# EAGLE board OpenBook_Board (EAGLE 9.7.0)
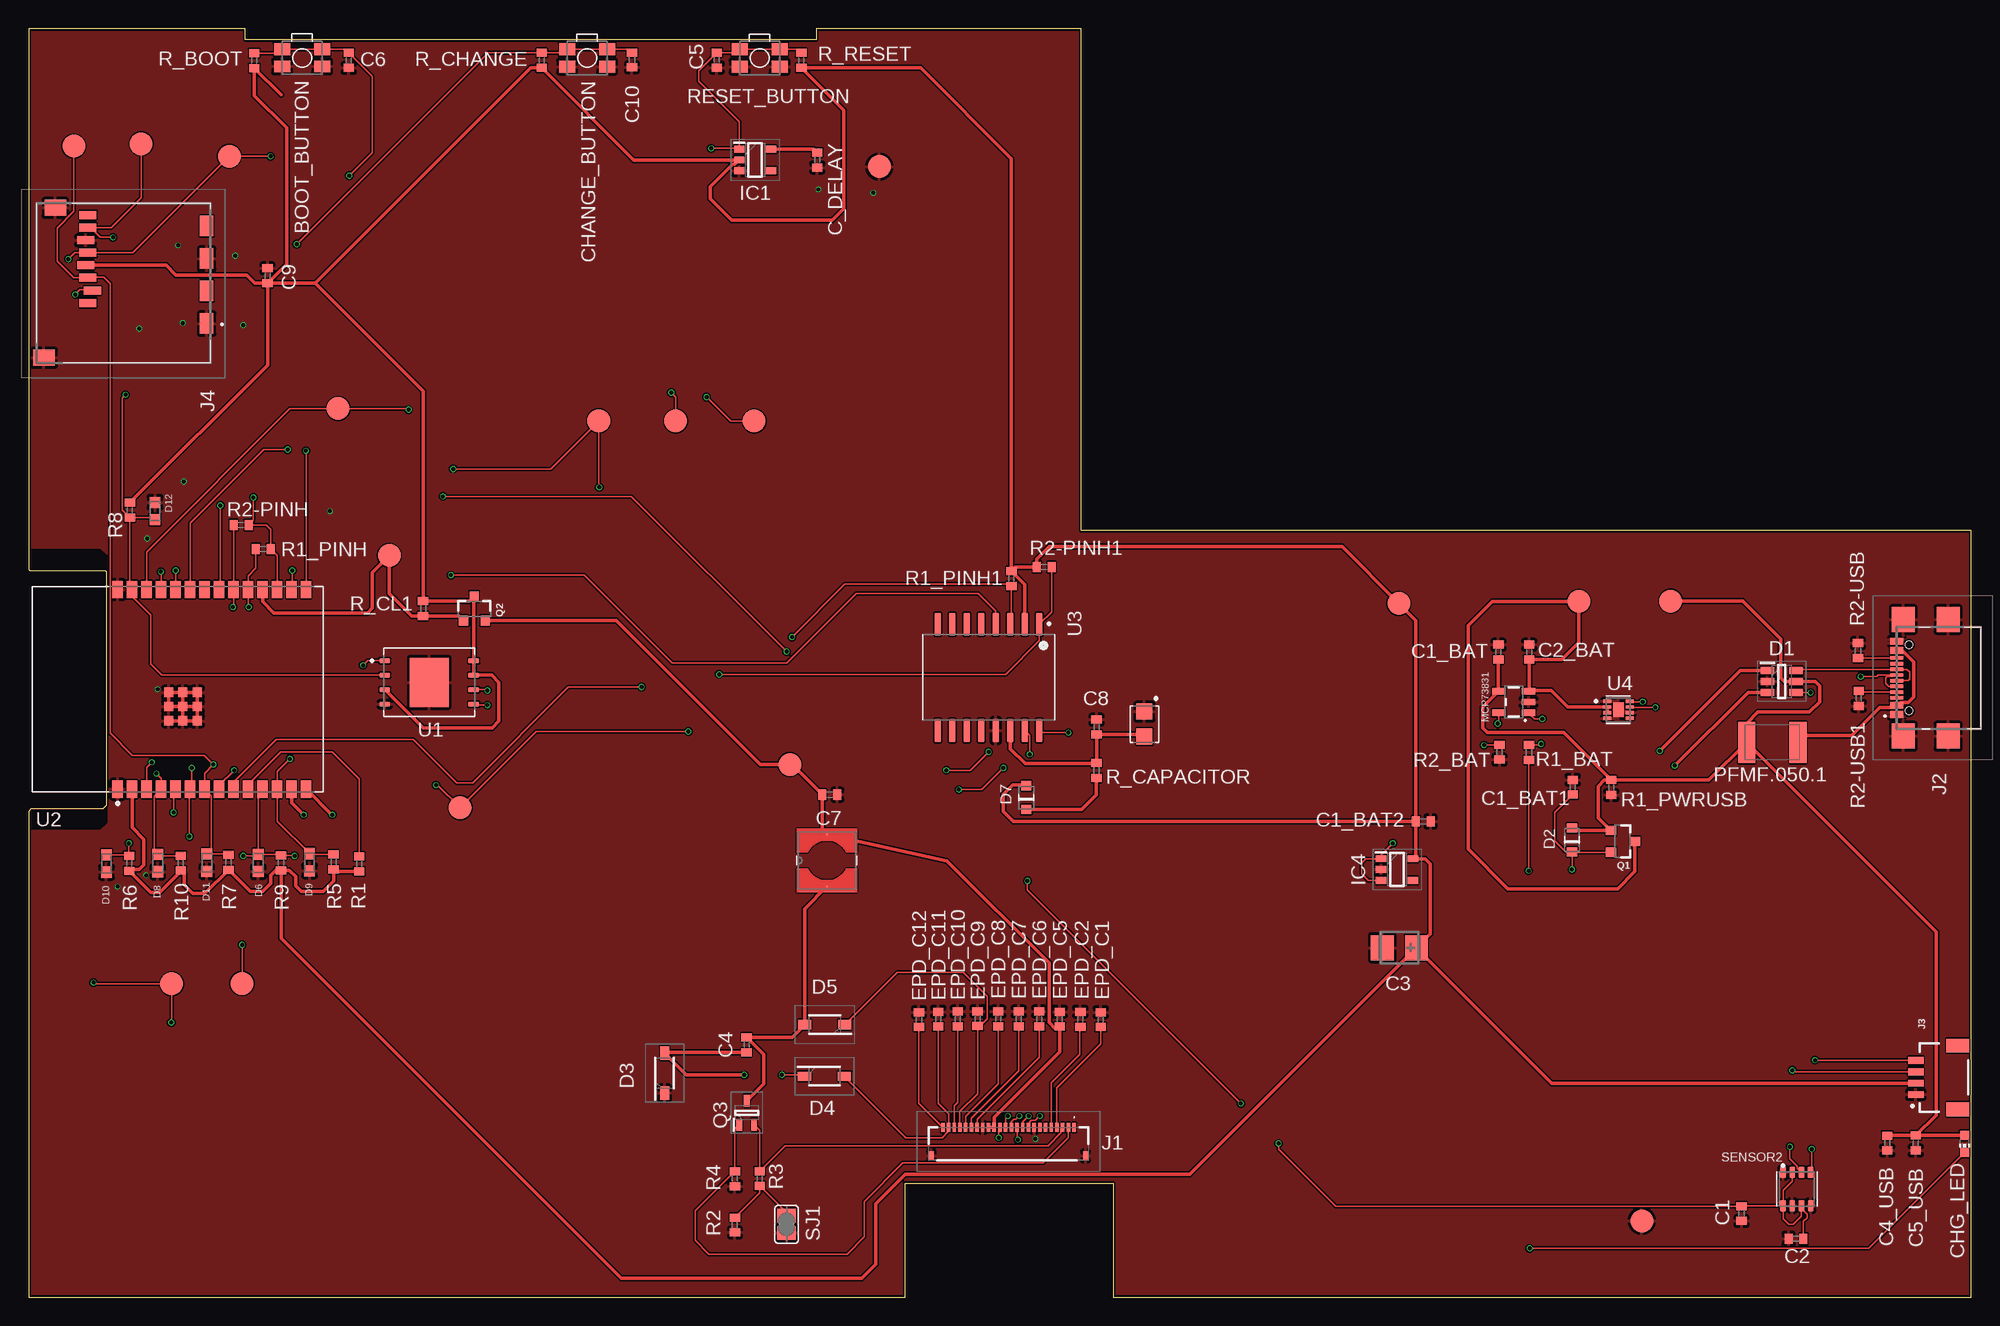
[diagram p0: board, top side]
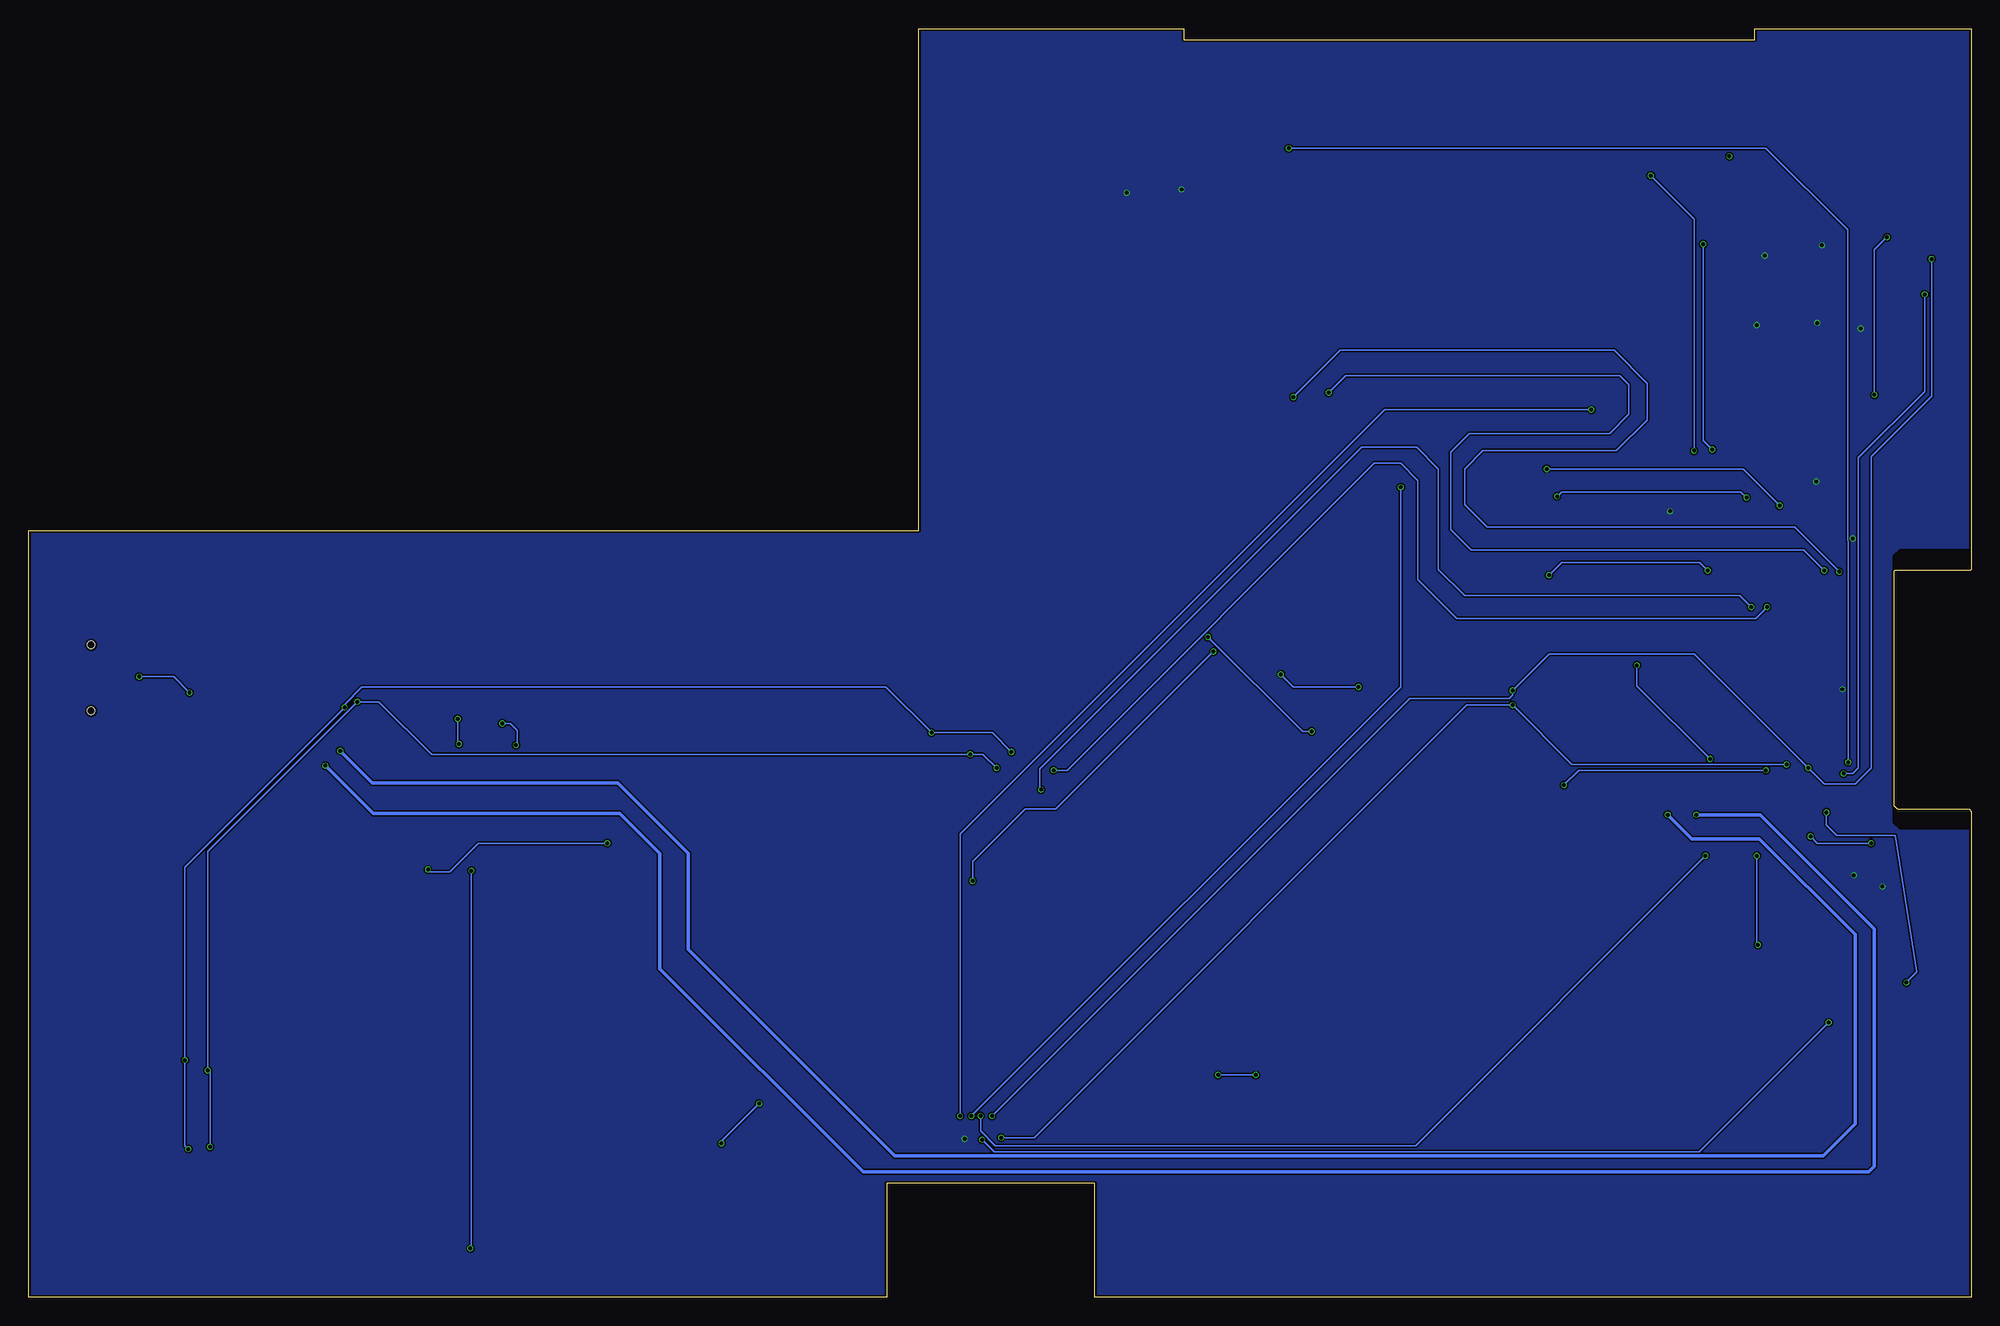
[diagram p1: board, bottom side, seen from below]

Size 170.2 x 111.2 mm. Coordinates in mm from the lower left corner, seen from the top.
Outline: 92.2,111.2 69,111.2 69,110.2 19,110.2 19,111.2 0,111.2 0,63.8 0.1,63.7 6.7,63.7 6.8,63.6 6.8,43.1 6.5,42.8 0.2,42.8 0,42.6 0,0 76.8,0 76.8,10 95,10 95,0 170.2,0 170.2,67.2 92.2,67.2 92.2,111.2
Copper layers (1*16): Top 0.035mm / dielectric 1.6mm / Bottom 0.035mm
Design rules "jlcpcb-2layers *": minimum track width 5mil, minimum drill 0.3mm, track to track 5mil, track to pad 5mil, pad to pad 5mil, via to via 5mil, smd to smd 5mil, copper to edge 0.2mm, drill to drill 6mil, minimum pad ring 10mil, minimum via ring 3mil, stop-mask expansion 4mil, vias tented up to drill 0mil, thermal gap 10mil

## Footprints (pad centres in the part's own frame; a part is rotated, then mirrored left to right if it is on the bottom)
MYBUTTON = smd 1.4 x 1.05: 1 1.75,0.75; 2 -1.75,0.75; 3 -1.75,-0.75; 4 1.75,-0.75
EAGLE-LTSPICE_C0402 = smd 0.7 x 0.9: 1 -0.65,0; 2 0.65,0
RCL_CT3528 = smd 2 x 2.2: + -1.5,0; - 1.5,0
CAPCP3225X100N = smd 1.4 x 1.4: 1 -1.1,0; 2 1.1,0
ADAFRUIT_CHIP-LED0603 = smd 0.8 x 0.8: A 0,-0.75; C 0,0.75
SOT95P280X145-6N = smd 1.2 x 0.6: 1 -1.25,0.95; 2 -1.25,0; 3 -1.25,-0.95; 4 1.25,-0.95; 5 1.25,0; 6 1.25,0.95
ESP32_WROVER_AVX---SD0805S020S1R0_AVX_SD0805S020S1R0_0 = smd 0.8 x 0.9: 1 -1.05,0; 2 1.05,0
SOD3716X135N = smd 1.15 x 0.8: 1 -1.75,0; 2 1.75,0
DIOC1608X36N = smd 0.97 x 0.94: 1 -0.75,0; 2 0.75,0
SOT95P280X125-5N = smd 0.9 x 0.6: 1 -1.4,0.95; 2 -1.4,0; 3 -1.4,-0.95; 4 1.4,-0.95; 5 1.4,0.95
SOT95P280X120-5N = smd 0.9 x 0.6: 1 -1.4,0.95; 2 -1.4,0; 3 -1.4,-0.95; 4 1.4,-0.95; 5 1.4,0.95
FH34SRJ24S05SH99 = smd 0.3 x 0.8: 1 5.75,1.45; 2 5.25,1.45; 3 4.75,1.45; 4 4.25,1.45; 5 3.75,1.45; 6 3.25,1.45; 7 2.75,1.45; 8 2.25,1.45; 9 1.75,1.45; 10 1.25,1.45; 11 0.75,1.45; 12 0.25,1.45; 13 -0.25,1.45; 14 -0.75,1.45; 15 -1.25,1.45; 16 -1.75,1.45; 17 -2.25,1.45; 18 -2.75,1.45; 19 -3.25,1.45; 20 -3.75,1.45; 21 -4.25,1.45; 22 -4.75,1.45; 23 -5.25,1.45; 24 -5.75,1.45 | smd 0.4 x 0.8: MP1 6.75,-1.05; MP2 -6.75,-1.05
SAMACSYS_PARTS_USB4110GFA = smd 0.3 x 1.15: A1 -3.35,3.678; A4 -2.55,3.678; A5 -1.25,3.678; A6 -0.25,3.678; A7 0.25,3.678; A8 1.25,3.678; A9 2.55,3.678; A12 3.35,3.678; B1 3.05,3.678; B4 2.25,3.678; B5 1.75,3.678; B6 0.75,3.678; B7 -0.75,3.678; B8 -1.75,3.678; B9 -2.25,3.678; B12 -3.05,3.678 | smd 2.18 x 2: MP1 -5.11,-0.827; MP2 5.11,-0.827; MP3 -5.11,3.103; MP4 5.11,3.103 | hole 0.65: -2.89,2.603; 2.89,2.603
JST04_1MM_RA = smd 0.6 x 1.35: 1 -1.5,0; 2 -0.5,0; 3 0.5,0; 4 1.5,0 | smd 1.2 x 2: NC1 2.8,-3.675; NC2 -2.8,-3.675
112ATAARR03ATTEND = smd 1.8 x 1.2: G1 10.6,10.4; G2 4.9,10.4; S1 7.75,10.4; S2 2.05,10.4 | smd 1.4 x 1.9: G3 13.6,-3.85; G4 0.45,-2.85 | smd 0.7 x 1.5: P1 8.8,0; P2 7.7,0.4; P3 6.6,0; P4 5.5,-0.2; P5 4.4,0; P6 3.3,-0.2; P7 2.2,0; P8 1.1,0
IND_4828-WE-TPC_WRE = smd 0.127 x 0.127: 1 -2.286,0; 2 2.286,0
ESP32_WROVER_SPARKFUN-IC-POWER_SOT23-5 = smd 0.55 x 1.2: 1 -0.95,-1.3; 2 0,-1.3; 3 0.95,-1.3; 4 0.95,1.3; 5 -0.95,1.3
ESP32C6_VARISTOR_CT/CN1812 = smd 1.5 x 3.6: 1 -2.25,0; 2 2.25,0
ESP32_WROVER_SPARKFUN-DISCRETESEMI_SOT23-3 = smd 0.8 x 0.9: 1 -0.95,-1; 2 0.95,-1; 3 0,1.1
SOT65P210X110-3N = smd 1.05 x 0.5: 1 -1.05,0.65; 2 -1.05,-0.65; 3 1.05,0
ESP32_WROVER_EAGLE-LTSPICE_R0402 = smd 0.7 x 0.9: 1 -0.65,0; 2 0.65,0
ESP32_WROVER_BME680_PSON80P300X300X100-8N = smd 1.016 x 0.5: 1 1.458,1.2; 2 1.458,0.4; 3 1.458,-0.4; 4 1.458,-1.2; 5 -1.458,-1.22; 6 -1.458,-0.4; 7 -1.458,0.4; 8 -1.458,1.2
SJ = smd 1.168 x 1.6: 1 -0.762,0; 2 0.762,0
TP20R = smd 2 x 2: TP 0,0
SON127P600X800X80-9N = smd 0.94 x 0.44: 1 -3.895,1.905; 2 -3.895,0.635; 3 -3.895,-0.635; 4 -3.895,-1.905; 5 3.895,-1.905; 6 3.895,-0.635; 7 3.895,0.635; 8 3.895,1.905 | smd 3.4 x 4.3: 9 0,0
XCVR_ESP32-C6-WROOM-1-N8 = smd 1.5 x 0.9: 1 -8.75,5.26; 2 -8.75,3.99; 3 -8.75,2.72; 4 -8.75,1.45; 5 -8.75,0.18; 6 -8.75,-1.09; 7 -8.75,-2.36; 8 -8.75,-3.63; 9 -8.75,-4.9; 10 -8.75,-6.17; 11 -8.75,-7.44; 12 -8.75,-8.71; 13 -8.75,-9.98; 14 -8.75,-11.25; 15 8.75,-11.25; 16 8.75,-9.98; 17 8.75,-8.71; 18 8.75,-7.44; 19 8.75,-6.17; 20 8.75,-4.9; 21 8.75,-3.63; 22 8.75,-2.36; 23 8.75,-1.09; 24 8.75,0.18; 25 8.75,1.45; 26 8.75,2.72; 27 8.75,3.99; 28 8.75,5.26 | smd 0.8 x 0.8: 29_1 -2.755,0.79; 29_2 -1.505,0.79; 29_3 -0.255,0.79; 29_4 -2.755,-0.46; 29_5 -1.505,-0.46; 29_6 -0.255,-0.46; 29_7 -2.755,-1.71; 29_8 -1.505,-1.71; 29_9 -0.255,-1.71
SOIC127P1032X265-16N = smd 2.05 x 0.59: 1 -4.655,4.445; 2 -4.655,3.175; 3 -4.655,1.905; 4 -4.655,0.635; 5 -4.655,-0.635; 6 -4.655,-1.905; 7 -4.655,-3.175; 8 -4.655,-4.445; 9 4.655,-4.445; 10 4.655,-3.175; 11 4.655,-1.905; 12 4.655,-0.635; 13 4.655,0.635; 14 4.655,1.905; 15 4.655,3.175; 16 4.655,4.445
SON50P200X200X80-9N = smd 0.76 x 0.27: 1 -0.985,0.75; 2 -0.985,0.25; 3 -0.985,-0.25; 4 -0.985,-0.75; 5 0.985,-0.75; 6 0.985,-0.25; 7 0.985,0.25; 8 0.985,0.75 | smd 0.9 x 1.3: 9 0,0

## Placement (x,y rotation side)
BOOT_BUTTON  BUTTON_CUSYOMV1  [MYBUTTON]  23.97,108.62 180 top
C1  100nF  [EAGLE-LTSPICE_C0402]  150.06,7.35 90 top
C1_BAT  4.7uF  [EAGLE-LTSPICE_C0402]  128.76,56.56 270 top
C1_BAT1  4.7uF  [EAGLE-LTSPICE_C0402]  135.28,44.72 270 top
C1_BAT2  4.7uF  [EAGLE-LTSPICE_C0402]  122.18,41.72 180 top
C2  100nF  [EAGLE-LTSPICE_C0402]  154.83,5.14 0 top
C2_BAT  4.7uF  [EAGLE-LTSPICE_C0402]  131.46,56.55 270 top
C3  100uF TANT  [RCL_CT3528]  120.08,30.65 180 top
C4  4.7uF/25V  [EAGLE-LTSPICE_C0402]  62.9,22.15 270 top
C4_USB  100nF  [EAGLE-LTSPICE_C0402]  162.82,13.53 90 top
C5  1uF  [EAGLE-LTSPICE_C0402]  60.28,108.43 90 top
C5_USB  4.7uF  [EAGLE-LTSPICE_C0402]  165.32,13.54 90 top
C6  100nF  [EAGLE-LTSPICE_C0402]  28.06,108.41 90 top
C7  10uF  [EAGLE-LTSPICE_C0402]  70.2,44.06 180 top
C8  100nF  [EAGLE-LTSPICE_C0402]  93.56,49.99 90 top
C9  100nF  [EAGLE-LTSPICE_C0402]  20.94,89.53 270 top
C10  100nF  [EAGLE-LTSPICE_C0402]  52.86,108.45 90 top
C10_SUPERCAP  CPH3225A  [CAPCP3225X100N]  97.75,50.24 270 top
C_DELAY  100nF  [EAGLE-LTSPICE_C0402]  69.1,99.67 90 top
CHANGE_BUTTON  BUTTON_CUSYOMV1  [MYBUTTON]  48.93,108.62 180 top
CHG_LED  [ADAFRUIT_CHIP-LED0603]  169.6,13.46 180 top
D1  USBLC6-2SC6Y  [SOT95P280X145-6N]  153.58,53.98 0 top
D2  ESP32_WROVER_AVX---SD0805S020S1R0_AVX_SD0805S020S1R0_0_0AVX_SD0805S020S1R0_0_0  [ESP32_WROVER_AVX---SD0805S020S1R0_AVX_SD0805S020S1R0_0]  135.21,40.09 90 top
D3  MBR0530  [SOD3716X135N]  55.72,19.66 90 top
D4  MBR0530  [SOD3716X135N]  69.72,19.39 0 top
D5  MBR0530  [SOD3716X135N]  69.74,23.91 180 top
D6  PGB1010603MR  [DIOC1608X36N]  20.12,38.08 90 top
D7  ESP32_WROVER_AVX---SD0805S020S1R0_AVX_SD0805S020S1R0_0_0AVX_SD0805S020S1R0_0_0  [ESP32_WROVER_AVX---SD0805S020S1R0_AVX_SD0805S020S1R0_0]  87.4,43.8 90 top
D8  PGB1010603MR  [DIOC1608X36N]  11.32,38.06 90 top
D9  PGB1010603MR  [DIOC1608X36N]  24.62,38.14 90 top
D10  PGB1010603MR  [DIOC1608X36N]  6.82,38.02 90 top
D11  PGB1010603MR  [DIOC1608X36N]  15.62,38.1 90 top
D12  PGB1010603MR  [DIOC1608X36N]  11.08,68.92 270 top
EPD_C1  1uF/50V  [EAGLE-LTSPICE_C0402]  93.92,24.35 90 top
EPD_C2  1uF/50V  [EAGLE-LTSPICE_C0402]  92.14,24.38 90 top
EPD_C5  1uF/50V  [EAGLE-LTSPICE_C0402]  90.34,24.39 90 top
EPD_C6  1uF/50V  [EAGLE-LTSPICE_C0402]  88.54,24.4 90 top
EPD_C7  1uF/50V  [EAGLE-LTSPICE_C0402]  86.74,24.41 90 top
EPD_C8  1uF/50V  [EAGLE-LTSPICE_C0402]  84.94,24.42 90 top
EPD_C9  1uF/50V  [EAGLE-LTSPICE_C0402]  83.14,24.43 90 top
EPD_C10  1uF/50V  [EAGLE-LTSPICE_C0402]  81.4,24.41 90 top
EPD_C11  1uF/50V  [EAGLE-LTSPICE_C0402]  79.7,24.39 90 top
EPD_C12  1uF/50V  [EAGLE-LTSPICE_C0402]  78,24.35 90 top
IC1  BD5229G-TR  [SOT95P280X125-5N]  63.65,99.68 0 top
IC4  XC6220A331MR-G  [SOT95P280X120-5N]  119.88,37.5 0 top
J1  FH34SRJ-24S-0.5SH_99_  [FH34SRJ24S05SH99]  85.84,13.45 0 top
J2  SAMACSYS_PARTS_USB4110-GF-A  [SAMACSYS_PARTS_USB4110GFA]  167.33,54.3 90 top
J3  QWIIC_RIGHT_ANGLE  [JST04_1MM_RA]  165.32,19.28 90 top
J4  112A-TAAR-R03_ATTEND  [112ATAARR03ATTEND]  5.2,95.95 270 top
L1  744043680IND_4828-WE-TPC_WRE  [IND_4828-WE-TPC_WRE]  69.94,38.3 90 top
MCP73831  ESP32_WROVER_SPARKFUN-IC-POWER_MCP73831  [ESP32_WROVER_SPARKFUN-IC-POWER_SOT23-5]  130.1,52.18 90 top
PFMF.050.1  ESP32C6_VARISTORCN1812  [ESP32C6_VARISTOR_CT/CN1812]  152.75,48.65 180 top
Q1  20V/4.2A/52mΩ/1.4W  [ESP32_WROVER_SPARKFUN-DISCRETESEMI_SOT23-3]  139.62,39.97 270 top
Q2  20V/4.2A/52mΩ/1.4W  [ESP32_WROVER_SPARKFUN-DISCRETESEMI_SOT23-3]  39.05,60.32 0 top
Q3  SI1308EDL-T1-GE3  [SOT65P210X110-3N]  62.91,16.19 90 top
R1  10K  [ESP32_WROVER_EAGLE-LTSPICE_R0402]  28.98,37.99 90 top
R1_BAT  200  [ESP32_WROVER_EAGLE-LTSPICE_R0402]  131.44,47.76 90 top
R1_PINH  10K  [ESP32_WROVER_EAGLE-LTSPICE_R0402]  20.56,65.58 0 top
R1_PINH1  10K  [ESP32_WROVER_EAGLE-LTSPICE_R0402]  86.1,63.01 90 top
R1_PWRUSB  100K  [ESP32_WROVER_EAGLE-LTSPICE_R0402]  138.65,44.68 270 top
R2  2.2  [ESP32_WROVER_EAGLE-LTSPICE_R0402]  61.88,6.35 90 top
R2-PINH  10K  [ESP32_WROVER_EAGLE-LTSPICE_R0402]  18.62,67.68 0 top
R2-PINH1  10K  [ESP32_WROVER_EAGLE-LTSPICE_R0402]  88.97,64 180 top
R2-USB  5k1  [ESP32_WROVER_EAGLE-LTSPICE_R0402]  160.26,56.69 90 top
R2-USB1  5k1  [ESP32_WROVER_EAGLE-LTSPICE_R0402]  160.32,52.5 90 top
R2_BAT  2k  [ESP32_WROVER_EAGLE-LTSPICE_R0402]  128.86,47.78 90 top
R3  0.47  [ESP32_WROVER_EAGLE-LTSPICE_R0402]  64.06,10.42 90 top
R4  10K  [ESP32_WROVER_EAGLE-LTSPICE_R0402]  61.88,10.41 90 top
R5  10K  [ESP32_WROVER_EAGLE-LTSPICE_R0402]  26.72,38.17 270 top
R6  10K  [ESP32_WROVER_EAGLE-LTSPICE_R0402]  8.82,38.05 270 top
R7  10K  [ESP32_WROVER_EAGLE-LTSPICE_R0402]  17.52,38.13 270 top
R8  10K  [ESP32_WROVER_EAGLE-LTSPICE_R0402]  8.88,68.99 90 top
R9  10K  [ESP32_WROVER_EAGLE-LTSPICE_R0402]  22.12,38.09 270 top
R10  10K  [ESP32_WROVER_EAGLE-LTSPICE_R0402]  13.34,38.06 270 top
R_BOOT  10K  [ESP32_WROVER_EAGLE-LTSPICE_R0402]  19.78,108.39 270 top
R_CAPACITOR  15  [ESP32_WROVER_EAGLE-LTSPICE_R0402]  93.55,46.18 270 top
R_CHANGE  10K  [ESP32_WROVER_EAGLE-LTSPICE_R0402]  44.95,108.41 270 top
R_CL1  10K  [ESP32_WROVER_EAGLE-LTSPICE_R0402]  34.56,60.37 90 top
R_RESET  10K  [ESP32_WROVER_EAGLE-LTSPICE_R0402]  67.7,108.41 270 top
RESET_BUTTON  BUTTON_CUSYOMV1  [MYBUTTON]  64.04,108.62 180 top
SENSOR2  ESP32_WROVER_BME680_BME680  [ESP32_WROVER_BME680_PSON80P300X300X100-8N]  154.9,9.5 90 top
SJ1  [SJ]  66.4,6.41 90 top
TP1  TPTP20R  [TP20R]  63.56,76.8 0 top
TP2  TPTP20R  [TP20R]  56.68,76.8 0 top
TP3  TPTP20R  [TP20R]  135.8,61 0 top
TP4  TPTP20R  [TP20R]  141.32,6.7 0 top
TP5  TPTP20R  [TP20R]  74.54,99.1 0 top
TP6  TPTP20R  [TP20R]  9.86,101.1 0 top
TP7  TPTP20R  [TP20R]  3.98,100.9 0 top
TP8  TPTP20R  [TP20R]  17.6,100 0 top
TP9  TPTP20R  [TP20R]  27.12,77.9 0 top
TP10  TPTP20R  [TP20R]  18.7,27.52 0 top
TP11  TPTP20R  [TP20R]  12.54,27.5 0 top
TP12  TPTP20R  [TP20R]  49.95,76.82 0 top
TP13  TPTP20R  [TP20R]  31.6,65.02 0 top
TP14  TPTP20R  [TP20R]  143.85,61.02 0 top
TP15  TPTP20R  [TP20R]  37.8,42.92 0 top
TP16  TPTP20R  [TP20R]  120.05,60.82 0 top
TP17  TPTP20R  [TP20R]  66.69,46.7 0 top
U1  W25Q512JVEIQ  [SON127P600X800X80-9N]  35.1,53.9 0 top
U2  ESP32-C6-WROOM-1-N8  [XCVR_ESP32-C6-WROOM-1-N8]  13.06,53.29 90 top
U3  DS3231SN#  [SOIC127P1032X265-16N]  84.11,54.34 270 top
U4  MAX17048G+T10  [SON50P200X200X80-9N]  139.27,51.5 0 top

## Library data of the parts
BOOT_BUTTON CHANGE_BUTTON CHG_LED PFMF.050.1 RESET_BUTTON SJ1 TP1-TP17 = DeskAssistant v19 v1
C1 C1_BAT C1_BAT1 C1_BAT2 C2 C2_BAT C4 C4_USB C5 C5_USB C6-C10 C_DELAY EPD_C1 EPD_C2 EPD_C5-EPD_C12 = DeskAssistant v19 v1; SPICEMODEL: NONE; SPICEPREFIX: C
C3 = DeskAssistant v19 v1; SPICEPREFIX: C
C10_SUPERCAP = DeskAssistant v19 v1; AVAILABILITY: Not in stock; CHECK_PRICES: https://www.snapeda.com/parts/CPH3225A/Seiko+Instruments/view-part/?ref=eda; DESCRIPTION: 11 mF (EDLC) Supercapacitor 3.3 V 1210 (3225 Metric) - -; MF: Seiko Instruments; MP: CPH3225A; PACKAGE: 1210 Seiko; PRICE: None; PURCHASE-URL: https://www.snapeda.com/api/url_track_click_mouser/?unipart_id=562593&manufacturer=Seiko Instruments&part_name=CPH3225A&search_term=None; SNAPEDA_LINK: https://www.snapeda.com/parts/CPH3225A/Seiko+Instruments/view-part/?ref=snap
D1 = DeskAssistant v19 v1; AVAILABILITY: In Stock; CHECK_PRICES: https://www.snapeda.com/parts/USBLC6-2SC6Y/STMicroelectronics/view-part/?ref=eda; DESCRIPTION: 17V Clamp 5A (8/20µs) Ipp Tvs Diode Surface Mount SOT-23-6; MF: STMicroelectronics; MP: USBLC6-2SC6Y; PACKAGE: SOT-23-6 STMicroelectronics; PRICE: None; SNAPEDA_LINK: https://www.snapeda.com/parts/USBLC6-2SC6Y/STMicroelectronics/view-part/?ref=snap
D2 = DeskAssistant v19 v1; CENTROID_NOT_SPECIFIED: No; DATASHEET: http://datasheets.avx.com/schottky.pdf; DIGIKEY_DESCRIPTION: DIODE SCHOTTKY 20V 1A 0805; DIGIKEY_PART_NUMBER: 478-7800-1-ND; LEAD_FREE: yes; MF: AVX; MOUSER_PART_NUMBER: 581-SD0805S020S1R0; PACKAGE: 0805 (2012 metric); PREFIX: D; ROHS: yes; SD0805S020S1R0: SD0805S020S1R0; TEMPERATURE_RANGE_HIGH: +125°C; TEMPERATURE_RANGE_LOW: -55°C
D3-D5 = DeskAssistant v19 v1; AVAILABILITY: In Stock; CHECK_PRICES: https://www.snapeda.com/parts/MBR0530/Onsemi/view-part/?ref=eda; DESCRIPTION: Diode Schottky 30 V 500mA Surface Mount SOD-123; MF: ON Semiconductor; MP: MBR0530; PACKAGE: SOD-123-2 ON Semiconductor; PRICE: None; PURCHASE-URL: https://www.snapeda.com/api/url_track_click_mouser/?unipart_id=179458&manufacturer=ON Semiconductor&part_name=MBR0530&search_term=None; SNAPEDA_LINK: https://www.snapeda.com/parts/MBR0530/Onsemi/view-part/?ref=snap
D6 D8-D12 = DeskAssistant v19 v1; AVAILABILITY: In Stock; CHECK_PRICES: https://www.snapeda.com/parts/PGB1010603MR/Littelfuse/view-part/?ref=eda; DESCRIPTION: 150V (Typ) Clamp - Ipp Tvs Diode Surface Mount 0603 (1608 Metric); MF: Littelfuse Inc.; MP: PGB1010603MR; PACKAGE: 0603 Littelfuse Inc.; PRICE: None; PURCHASE-URL: https://www.snapeda.com/api/url_track_click_mouser/?unipart_id=5659453&manufacturer=Littelfuse Inc.&part_name=PGB1010603MR&search_term=None; SNAPEDA_LINK: https://www.snapeda.com/parts/PGB1010603MR/Littelfuse/view-part/?ref=snap
D7 = DeskAssistant v19 v1; CENTROID_NOT_SPECIFIED: No; DATASHEET: http://datasheets.avx.com/schottky.pdf; DIGIKEY_DESCRIPTION: DIODE SCHOTTKY 20V 1A 0805; DIGIKEY_PART_NUMBER: 478-7800-1-ND; DIODE: SD0805S020S1R0; LEAD_FREE: yes; MF: AVX; MOUSER_PART_NUMBER: 581-SD0805S020S1R0; PACKAGE: 0805 (2012 metric); PREFIX: D; ROHS: yes; TEMPERATURE_RANGE_HIGH: +125°C; TEMPERATURE_RANGE_LOW: -55°C
IC1 = DeskAssistant v19 v1; DESCRIPTION: Voltage Detector with Adjustable Delay Time: CMOS processes are utilized to develop high precision, low current consumption CMOS reset ICs that allow arbitrary setting of the delay time. The extensive lineup includes both Nch Open Drain and CMOS output types in a wide range of detection voltages (from 2.3V to 6.0V, in 0.1V steps), enabling selection of the ideal solution based on customer requirements. In addition, the entire series is of course both lead-free and RoHS-compliant.; HEIGHT: 1.25mm; MANUFACTURER_NAME: ROHM Semiconductor; MANUFACTURER_PART_NUMBER: BD5229G-TR; MOUSER_PART_NUMBER: 755-BD5229G-TR; MOUSER_PRICE-STOCK: https://www.mouser.co.uk/ProductDetail/ROHM-Semiconductor/BD5229G-TR?qs=4kLU8WoGk0vvnhrrYwdszw%3D%3D
IC4 = DeskAssistant v19 v1; DESCRIPTION: LDO Voltage Regulators; HEIGHT: 1.2mm; MANUFACTURER_NAME: Torex; MANUFACTURER_PART_NUMBER: XC6220A331MR-G; MOUSER_PART_NUMBER: 865-XC6220A331MR-G; MOUSER_PRICE-STOCK: https://www.mouser.co.uk/ProductDetail/Torex-Semiconductor/XC6220A331MR-G?qs=AsjdqWjXhJ8ZSWznL1J0gg%3D%3D
J1 = DeskAssistant v19 v1; DESCRIPTION: 24 Position FFC, FPC Connector Contacts, Top and Bottom 0.020" (0.50mm) Surface Mount, Right Angle; HEIGHT: 1.1mm; MANUFACTURER_NAME: Hirose; MANUFACTURER_PART_NUMBER: FH34SRJ-24S-0.5SH(99); MOUSER_PART_NUMBER: 798-FH34SRJ24S05SH99; MOUSER_PRICE-STOCK: https://www.mouser.co.uk/ProductDetail/Hirose-Connector/FH34SRJ-24S-0.5SH99?qs=vcbW%252B4%252BSTIpKBl5ap9J8Fw%3D%3D
J2 = DeskAssistant v19 v1; DESCRIPTION: CONN USB 2.0 TYPE-C R/A SMT; HEIGHT: 3.26mm; MANUFACTURER_NAME: GCT (GLOBAL CONNECTOR TECHNOLOGY); MANUFACTURER_PART_NUMBER: USB4110-GF-A; MOUSER_PART_NUMBER: 640-USB4110-GF-A; MOUSER_PRICE-STOCK: https://www.mouser.co.uk/ProductDetail/GCT/USB4110-GF-A?qs=KUoIvG%2F9IlYiZvIXQjyJeA%3D%3D
J3 = DeskAssistant v19 v1; PROD_ID: CONN-13694
J4 = DeskAssistant v19 v1; DESCRIPTION: Micro SD Card Socket, Push-Push Type, Top Mount, SMT, H=1.83mm, 10u; HEIGHT: 1.9mm; MANUFACTURER_NAME: ATTEND; MANUFACTURER_PART_NUMBER: 112A-TAAR-R03 ATTEND
L1 = DeskAssistant v19 v1; COPYRIGHT: Copyright (C) 2024 Ultra Librarian. All rights reserved.; L1: 68uH; MANUFACTURER_PART_NUMBER: 744043680; MFR_NAME: Wurth Electronics
MCP73831 = DeskAssistant v19 v1; PROD_ID: IC-09995
Q1 = DeskAssistant v19 v1; DMG2305UX-7: DMG2305UX-7; PROD_ID: TRAN-14388
Q2 = DeskAssistant v19 v1; PROD_ID: TRAN-14388
Q3 = DeskAssistant v19 v1; AVAILABILITY: In Stock; CHECK_PRICES: https://www.snapeda.com/parts/SI1308EDL-T1-GE3/Vishay+Siliconix/view-part/?ref=eda; DESCRIPTION: Si1308EDL-T1-GE3 N-channel MOSFET Transistor, 1.5 A, 30 V, 3-Pin SC-70 | Siliconix / Vishay SI1308EDL-T1-GE3; MF: Vishay Siliconix; MP: SI1308EDL-T1-GE3; PACKAGE: SOT-323 Vishay Semiconductor; PRICE: None; PURCHASE-URL: https://www.snapeda.com/api/url_track_click_mouser/?unipart_id=274603&manufacturer=Vishay Siliconix&part_name=SI1308EDL-T1-GE3&search_term=None; SNAPEDA_LINK: https://www.snapeda.com/parts/SI1308EDL-T1-GE3/Vishay+Siliconix/view-part/?ref=snap
R1 R1_BAT R1_PINH R1_PINH1 R1_PWRUSB R2 R2-PINH R2-PINH1 R2-USB R2-USB1 R2_BAT R3-R10 R_BOOT R_CAPACITOR R_CHANGE R_CL1 R_RESET = DeskAssistant v19 v1; SPICEMODEL: NONE; SPICEPREFIX: R
SENSOR2 = DeskAssistant v19 v1; AVAILABILITY: Unavailable; DESCRIPTION: Integrated Environmental Unit; MF: Bosch Sensortec; MP: BME680; MP1: BME688; PACKAGE: LGA-8 Bosch Tools; PRICE: None
U1 = DeskAssistant v19 v1; AVAILABILITY: In Stock; CHECK_PRICES: https://www.snapeda.com/parts/W25Q512JVEIQ/Winbond+Electronics/view-part/?ref=eda; DESCRIPTION: FLASH - NOR Memory IC 512Mb (64M x 8) SPI - Quad I/O 133 MHz 8-WSON (8x6); MF: Winbond Electronics; MP: W25Q512JVEIQ; PACKAGE: Package; PRICE: None; SNAPEDA_LINK: https://www.snapeda.com/parts/W25Q512JVEIQ/Winbond+Electronics/view-part/?ref=snap
U2 = DeskAssistant v19 v1; AVAILABILITY: In Stock; CHECK_PRICES: https://www.snapeda.com/parts/ESP32-C6-WROOM-1-N8/Espressif+Systems/view-part/?ref=eda; DESCRIPTION: Multiprotocol Modules ESP32-C6 module, Wi-Fi 6 in 2.4 GHz band, Bluetooth 5, Zigbee 3.0 and Thread. ESP34-WROOM Compatible - ENGINEERING SAMPLE; MF: Espressif Systems; MP: ESP32-C6-WROOM-1-N8; PACKAGE: None; PRICE: None; SNAPEDA_LINK: https://www.snapeda.com/parts/ESP32-C6-WROOM-1-N8/Espressif+Systems/view-part/?ref=snap
U3 = DeskAssistant v19 v1; AVAILABILITY: In Stock; CHECK_PRICES: https://www.snapeda.com/parts/DS3231SN%23/Analog+Devices/view-part/?ref=eda; DESCRIPTION: Extremely Accurate I²C-Integrated RTC/TCXO/Crystal; MF: Analog Devices; MP: DS3231SN#; PACKAGE: SOIC-16 Maxim; PRICE: None; PURCHASE-URL: https://www.snapeda.com/api/url_track_click_mouser/?unipart_id=99048&manufacturer=Analog Devices&part_name=DS3231SN#&search_term=None; SNAPEDA_LINK: https://www.snapeda.com/parts/DS3231SN%23/Analog+Devices/view-part/?ref=snap
U4 = DeskAssistant v19 v1; AVAILABILITY: In Stock; CHECK_PRICES: https://www.snapeda.com/parts/MAX17048G+T10/Analog+Devices/view-part/?ref=eda; DESCRIPTION: 3µA 1-Cell/2-Cell Fuel Gauge with ModelGauge; MF: Analog Devices; MP: MAX17048G+T10; PACKAGE: TDFN-8 Maxim; PRICE: None; PURCHASE-URL: https://www.snapeda.com/api/url_track_click_mouser/?unipart_id=329239&manufacturer=Analog Devices&part_name=MAX17048G+T10&search_term=None; SNAPEDA_LINK: https://www.snapeda.com/parts/MAX17048G+T10/Analog+Devices/view-part/?ref=snap

## Nets
3V3: C1_BAT2.2 C3.+ C9.2 D7.2 IC1.2 IC4.5 J3.2 J4.P4 Q2.3 R1.1 R1_PINH1.2 R2-PINH1.2 R5.2 R6.2 R7.2 R8.2 R9.2 R10.2 R_BOOT.2 R_CHANGE.2 R_CL1.2 R_RESET.2 TP16.TP U1.3 U1.7 U1.8 U2.2 U3.2
32KHZ: R2-PINH1.1 U2.9 U3.1
DN: D1.4 J2.A7 J2.B7
DP: D1.6 J2.A6 J2.B6
EPD_3V3: C7.2 EPD_C5.1 J1.15 J1.16 L1.2 Q2.2 TP17.TP
EPD_3V3_C: Q2.1 R_CL1.1 TP13.TP U2.18
EPD_BUSY: J1.9 TP9.TP U2.26
EPD_CS: D6.2 J1.12 R9.1 TP10.TP U2.11
EPD_DC: J1.11 TP11.TP U2.5
EPD_RST: J1.10 TP12.TP U2.21
FLASH_CS: D9.2 R5.1 U1.1 U2.12
GDR: J1.2 Q3.1 R4.2
GND: BOOT_BUTTON.1 BOOT_BUTTON.2 C1.1 C1_BAT1.1 C1_BAT2.1 C1_BAT.1 C2.1 C2_BAT.1 C3.- C4_USB.1 C5.1 C5_USB.1 C6.1 C7.1 C8.2 C9.1 C10.1 C10_SUPERCAP.1 C_DELAY.1 CHANGE_BUTTON.1 CHANGE_BUTTON.2 D1.2 D3.1 D6.1 D8.1 D9.1 D10.1 D11.1 D12.1 EPD_C1.2 EPD_C2.2 EPD_C5.2 EPD_C6.2 EPD_C7.2 EPD_C8.2 EPD_C9.2 EPD_C10.2 EPD_C11.2 EPD_C12.2 IC1.3 IC4.2 J1.8 J1.17 J1.MP1 J1.MP2 J2.A1 J2.A12 J2.B1 J2.B12 J2.MP1 J2.MP2 J2.MP3 J2.MP4 J3.1 J4.G1 J4.G2 J4.G3 J4.G4 J4.P6 MCP73831.2 R1_PWRUSB.2 R2-USB1.1 R2-USB.2 R2.1 R2_BAT.1 R4.1 RESET_BUTTON.1 RESET_BUTTON.2 SENSOR2.1 SENSOR2.5 SENSOR2.7 SJ1.1 TP4.TP TP5.TP U1.4 U1.9 U2.1 U2.28 U2.29_1 U2.29_2 U2.29_3 U2.29_4 U2.29_5 U2.29_6 U2.29_7 U2.29_8 U2.29_9 U3.13 U4.1 U4.4 U4.6 U4.9
GPIO8: R1.2 U2.10
I2C_PW: C1.2 C2.2 R1_PINH.2 R2-PINH.2 SENSOR2.2 SENSOR2.6 SENSOR2.8 U2.17
INT_RTC: R1_PINH1.1 TP15.TP U2.8 U3.3
IO/BOOT: BOOT_BUTTON.3 BOOT_BUTTON.4 C6.2 R_BOOT.1 U2.15
IO/CHANGE: C10.2 CHANGE_BUTTON.3 CHANGE_BUTTON.4 R_CHANGE.1 U2.23
MISO: D12.2 J4.P7 R8.1 TP6.TP U1.2 U2.27
MOSI: D11.2 J1.14 J4.P3 R7.1 TP7.TP U1.5 U2.7
N$1: J2.A5 R2-USB1.2
N$2: J2.B5 R2-USB.1
N$3: C1_BAT1.2 D2.1 IC4.1 IC4.3 Q1.2
N$5: C4.2 D3.2 D4.1
N$6: CHG_LED.C R1_BAT.1
N$7: MCP73831.1 R1_BAT.2
N$8: MCP73831.5 R2_BAT.2
N$9: EPD_C12.1 J1.24
N$10: C_DELAY.2 IC1.5
N$11: EPD_C2.1 J1.5
N$12: EPD_C10.1 J1.22
N$14: EPD_C8.1 J1.20
N$15: EPD_C7.1 J1.19
N$16: EPD_C6.1 J1.18
N$18: EPD_C1.1 J1.4
N$23: D7.1 R_CAPACITOR.2
PREVGH: D5.1 EPD_C9.1 J1.21
PREVGL: D4.2 EPD_C11.1 J1.23
RESE: J1.3 Q3.2 R3.2
RESE': R2.2 R3.1 SJ1.2
RESET: C5.2 IC1.1 R_RESET.1 RESET_BUTTON.3 RESET_BUTTON.4 U2.3
RTC_RST: U2.16 U3.4
RX: TP2.TP U2.24
SCK: D10.2 J1.13 J4.P5 R6.1 TP8.TP U1.6 U2.6
SCL: J3.4 R2-PINH.1 SENSOR2.4 U2.20 U3.16 U4.7
SDA: J3.3 R1_PINH.1 SENSOR2.3 U2.19 U3.15 U4.8
SRC: C4.1 D5.2 L1.1 Q3.3
SS_SD: D8.2 J4.P2 R10.1 U2.4
TX: TP1.TP U2.25
USB_D+: D1.1 U2.14
USB_D-: D1.3 U2.13
VBAT: C2_BAT.2 MCP73831.3 Q1.3 TP3.TP U4.2 U4.3
VBUS: C1_BAT.2 C4_USB.2 C5_USB.2 CHG_LED.A D1.5 D2.2 MCP73831.4 PFMF.050.1.2 Q1.1 R1_PWRUSB.1 TP14.TP
VRTC: C8.1 C10_SUPERCAP.2 R_CAPACITOR.1 U3.14
VUSB: J2.A4 J2.A9 J2.B4 J2.B9 PFMF.050.1.1

## Tracks (layer width: path | path; a pad name or v marks a point on that pad's centre or on a via)
3V3
  Top 0.305: J3.2 133.45,18.78 C3.+ | 121.58,29.72 C3.+ | C3.+ 122.8,31.87 122.8,38 122.35,38.45 IC4.5 121.53,38.7 C1_BAT2.2 | C1_BAT2.2 121.53,59.34 TP16.TP 115.07,65.8 89.4,65.8 88.32,64.72 R2-PINH1.2 86.44,64 R1_PINH1.2 | R1_PINH1.2 86.1,99.8 78.14,107.76 R_RESET.2 71.4,104.06 71.4,95.4 70.4,94.4 61.6,94.4 59.7,96.3 59.7,97.33 61.68,99.31 61.88,99.31 IC1.2 53.03,99.68 R_CHANGE.2 | R1_PINH1.2 87.28,62.48 U3.2 | C1_BAT2.2 86.28,41.72 85.4,42.6 85.4,44.1 86.2,44.9 87.35,44.9 D7.2 | U1.3 34.57,49.9 40.6,49.9 41.2,50.5 41.2,53.9 40.56,54.54 U1.7 U1.8 38.99,61.37 Q2.3 38.65,61.02 R_CL1.2 34.56,79.44 25.12,88.88 | R1.1 26.9,37.34 R5.2 26.72,36.52 25.8,35.6 23.88,35.6 23.4,36.08 23.4,36.9 22.86,37.44 R9.2 | C9.2 23.48,88.88 | J4.P4 12.05,90.45 12.9,89.6 19.1,89.6 19.82,88.88 C9.2 | R8.2 20.94,81.7 C9.2 | U2.2 9.07,41.17 10.1,40.15 10.1,37.9 9.7,37.5 8.92,37.5 R6.2 10.72,35.5 11.5,35.5 13.34,37.34 R10.2 13.64,37.11 13.64,36.16 14.4,35.4 15.44,35.4 R7.2 19.4,35.6 20.5,35.6 21.2,36.3 21.2,37 21.64,37.44 R9.2 | 25.12,88.88 C9.2 | 22.12,105.4 R_BOOT.2 19.78,105.32 22.6,102.5 22.6,90.54 C9.2 | 44.95,107.55 R_CHANGE.2 | R_CHANGE.2 44,107.76 25.12,88.88 | C3.+ 101.73,10.8 76.8,10.8 74.2,8.2 74.2,2.9 73,1.7 51.9,1.7 22.12,31.48 R9.2
32KHZ  (via drill 0.35)
  Top 0.15: R2-PINH1.1 89.62,60.06 U3.1 88.56,57.56 85.6,54.6 v60.5,54.6 | U2.9 17.96,45.16 21.7,48.9 33.7,48.9 37.5,45.1 38.9,45.1 47.3,53.5 v53.7,53.5
  Bottom 0.15: v60.5,54.6 59.4,53.5 v53.7,53.5
DN  (via drill 0.35)
  Top 0.15: D1.4 156.07,53.03 v156.1,53 | v160.5,54.4 161.9,54.4 162.05,54.55 163.4,54.55 | J2.A7 163.4,54.55 | 163.4,54.55 163.25,54.4 162.79,54.4 162.68,54.28 162.68,53.82 162.94,53.55 J2.B7
  Bottom 0.15: v156.1,53 157.5,54.4 v160.5,54.4
DP
  Top 0.15: D1.6 154.95,55.05 J2.B6 164.55,55.05 164.8,54.8 164.8,54.2 164.65,54.05 J2.A6
EPD_3V3
  Top 0.305: 90.34,23.6 90.34,21.54 84.59,15.79 J1.15 J1.16 | 90.34,23.6 EPD_C5.1 | 90.34,23.6 89.9,23.6 89.4,24.1 89.4,29.3 80.44,38.26 L1.2 69.55,40.98 C7.2 66.91,46.7 TP17.TP 64.1,46.7 51.48,59.32 Q2.2
EPD_3V3_C
  Top 0.305: Q2.1 37.7,59.72 R_CL1.1 33.58,59.72 31.6,61.7 TP13.TP 30.1,63.52 30.1,60.4 29.7,60 21.5,60 20.5,61 U2.18
EPD_BUSY  (via drill 0.35)
  Top 0.15: U2.26 10.34,65.34 22.9,77.9 TP9.TP 33.2,77.9 v33.3,77.8 | v88.6,15.9 88.2,15.5 87.86,15.5 87.59,15.24 J1.9
  Bottom 0.15: v33.3,77.8 51.4,77.8 88.6,40.6 v88.6,15.9
EPD_CS  (via drill 0.35)
  Top 0.15: U2.11 20.12,44.16 D6.2 | D6.2 22.03,38.83 R9.1 23.26,38.74 v23.3,38.7 | D6.2 19.99,38.7 v18.8,38.7 | TP10.TP v18.7,30.9 | v86.8,15.9 86.5,15.6 86.3,15.6 86.09,15.39 J1.12
  Bottom 0.15: v18.8,38.7 18.8,31 v18.7,30.9 | v23.3,38.7 48.7,13.3 85.5,13.3 86.8,14.6 v86.8,15.9
EPD_DC  (via drill 0.35)
  Top 0.15: v5.7,27.6 5.8,27.5 TP11.TP 12.54,24.14 v12.5,24.1 | v12.7,42.5 12.7,44.36 U2.5 | J1.11 86.59,13.91 v86.67,13.83
  Bottom 0.15: v12.7,42.5 12.7,41.4 11.8,40.5 6.67,40.5 4.78,28.52 v5.7,27.6 | v12.5,24.1 23.85,12.75 85.59,12.75 v86.67,13.83
EPD_RST  (via drill 0.35)
  Top 0.15: v16.8,69.4 16.8,62.15 U2.21 | v87.6,15.9 87.09,15.39 J1.10 | v50,71 49.95,71.05 49.95,76.8 | 49.95,76.8 TP12.TP | v37.2,72.6 45.75,72.6 49.95,76.8
  Bottom 0.15: v87.6,15.9 50,53.5 v50,71 | v16.8,69.4 20,72.6 v37.2,72.6
FLASH_CS  (via drill 0.35)
  Top 0.15: R5.1 24.69,38.82 D9.2 21.77,41.74 U2.12 21.77,46.07 v22.9,47.2 | v29.3,55.4 29.7,55.81 U1.1
  Bottom 0.15: v29.3,55.4 29.3,53.6 v22.9,47.2
GDR
  Top 0.15: Q3.1 61.88,14.76 R4.2 58.4,7.58 58.4,5 59.6,3.8 71.7,3.8 73.2,5.3 73.2,8.4 76.6,11.8 88.9,11.8 91.09,13.99 J1.2
GND  (via drill 0.35)
  Top 0.305: U2.29_8 U2.29_5 | U2.29_5 U2.29_6 | U2.29_6 U2.29_3 U2.29_2 U2.29_5 | U2.29_5 U2.29_4 | U2.29_4 U2.29_1 | U2.29_4 U2.29_7 U2.29_8 | U2.29_8 U2.29_9 U2.29_6
  other vias: 13.6,71.5 26.4,68.9 10.4,66.5 9.7,84.9 11.3,53.3 88.2,13.9 10.3,37 7.8,36 69.2,97.1 74,96.8 18.1,91.3 13.5,85.4 18.8,85.2 13.1,92.2
  pour Top: 76.76,10.06 76.78,10.08 95.02,10.08 95.04,10.06 95.06,10.04 95.08,10.02 95.08,0.08 170.12,0.08 170.12,67.12 92.18,67.12 92.16,67.14 92.14,67.16 92.12,67.18 92.12,111.12 69.08,111.12 69.08,110.18 69.06,110.16 69.04,110.14 69.02,110.12 18.98,110.12 18.96,110.14 18.94,110.16 18.92,110.18 18.92,111.12 0.08,111.12 0.08,65.68 6.32,65.68 6.34,65.66 6.96,65.04 6.98,65.02 6.98,41.58 6.96,41.56 6.34,40.94 6.32,40.92 0.08,40.92 0.08,0.08 76.72,0.08 76.72,10.02 76.74,10.04
  pour Bottom: 6.96,41.56 6.34,40.94 6.32,40.92 0.08,40.92 0.08,0.08 76.72,0.08 76.72,10.02 76.74,10.04 76.76,10.06 76.78,10.08 95.02,10.08 95.04,10.06 95.06,10.04 95.08,10.02 95.08,0.08 170.12,0.08 170.12,67.12 92.18,67.12 92.16,67.14 92.14,67.16 92.12,67.18 92.12,111.12 69.08,111.12 69.08,110.18 69.06,110.16 69.04,110.14 69.02,110.12 18.98,110.12 18.96,110.14 18.94,110.16 18.92,110.18 18.92,111.12 0.08,111.12 0.08,65.68 6.32,65.68 6.34,65.66 6.96,65.04 6.98,65.02 6.98,41.58
GPIO8
  Top 0.15: U2.10 19.23,44.93 22.1,47.8 26.6,47.8 28.98,45.42 R1.2
I2C_PW  (via drill 0.35)
  Top 0.15: SENSOR2.8 153.7,9.4 154.5,10.2 SENSOR2.2 | SENSOR2.8 153.7,6.9 154.2,6.4 154.6,6.4 155.3,7.1 155.3,7.8 | 155.3,7.8 SENSOR2.6 | C2.2 155.48,6.68 155.8,7 155.8,7.3 155.3,7.8 | SENSOR2.8 150.1,8.04 C1.2 114.5,8 109.5,13 v109.5,13.5 | U2.17 21.77,65.02 R1_PINH.2 21.21,67.29 20.82,67.68 R2-PINH.2 19.7,68.11 v19.7,70.1 | v36.3,70.2 52.8,70.2 v66.4,56.6 | v87.5,36.5 87.5,35.7 v106.2,17
  Bottom 0.15: v36.3,70.2 35.9,70.6 20.2,70.6 v19.7,70.1 | v66.4,56.6 80.2,42.8 82.9,42.8 87.5,38.2 v87.5,36.5 | v106.2,17 109.5,13.7 v109.5,13.5
INT_RTC  (via drill 0.35)
  Top 0.15: U3.3 86.1,59.08 R1_PINH1.1 85.96,62.5 71.5,62.5 v66.88,57.88 | v57.8,49.6 44.48,49.6 TP15.TP 35.82,44.9 v35.7,44.9 | U2.8 16.69,44.89 v18,46.2
  Bottom 0.15: v35.7,44.9 34.4,46.2 v18,46.2 | v57.8,49.6 58.6,49.6 v66.88,57.88
IO/BOOT  (via drill 0.35)
  Top 0.15: R_BOOT.1 21.89,109.04 BOOT_BUTTON.4 BOOT_BUTTON.3 27.75,109.38 C6.2 30.1,107.02 30.1,100.3 v28.1,98.3 | U2.15 24.31,74.19 v24.3,74.2
  Bottom 0.15: v28.1,98.3 24.3,94.5 v24.3,74.2
IO/CHANGE  (via drill 0.35)
  Top 0.15: C10.2 52.59,109.37 CHANGE_BUTTON.3 CHANGE_BUTTON.4 46.87,109.06 R_CHANGE.1 40.26,109.06 v23.5,92.3 | U2.23 14.15,67.85 20.6,74.3 v22.7,74.3
  Bottom 0.15: v23.5,92.3 23.5,75.1 v22.7,74.3
MISO  (via drill 0.35)
  Top 0.15: TP6.TP 9.86,96.36 7.25,93.75 J4.P7 5.45,93.75 6.3,92.9 v7.4,92.9 | R8.1 8.88,62.23 U2.27 9.07,61.43 10.7,59.8 10.7,55.5 11.67,54.54 U1.2 | R8.1 10.91,68.34 D12.2 | R8.1 8.23,68.99 8.23,78.83 v8.5,79.1
  Bottom 0.15: v7.4,92.9 8.5,91.8 v8.5,79.1
MOSI  (via drill 0.35)
  Top 0.15: R7.1 17.45,38.85 D11.2 16,39.23 16,43.96 U2.7 15.42,45.92 v16.2,46.7 15.4,47.5 9.1,47.5 7.15,49.45 7.15,88.85 6.6,89.4 5.25,89.4 J4.P3 3.95,89.35 2.5,90.8 2.5,93.71 3.98,95.19 TP7.TP | J1.14 85,14.81 v85,14 | v40.2,51.9 39.09,51.9 U1.5
  Bottom 0.15: v85,14 82.1,14 44.2,51.9 v40.2,51.9 35,46.7 v16.2,46.7
N$1
  Top 0.15: J2.A5 160.42,53.05 R2-USB1.2
N$2
  Top 0.15: J2.B5 R2-USB.1
N$3  (via drill 0.35)
  Top 0.15: Q1.2 135.23,39.02 D2.1 | C1_BAT1.2 133.7,42.49 133.7,40 134.66,39.04 D2.1 | IC4.3 117.35,36.55 116.8,37.1 116.8,38.1 117.15,38.45 IC4.1 118.48,38.78 v119.5,39.8 | D2.1 v135.21,37.51 v135.2,37.5
  Bottom 0.15: v119.5,39.8 130.8,39.8 133.3,37.3 135,37.3 v135.2,37.5
N$5  (via drill 0.35)
  Top 0.15: D4.1 68.04,19.46 68,19.5 v66,19.5
  Top 0.305: C4.2 55.81,21.5 D3.2 57.63,19.5 v62.7,19.5
  Bottom 0.15: v62.7,19.5 v66,19.5
N$6  (via drill 0.35)
  Top 0.15: v131.5,4.3 161.19,4.3 CHG_LED.C | R1_BAT.1 131.44,37.44 v131.4,37.4
  Bottom 0.15: v131.4,37.4 131.4,4.4 v131.5,4.3
N$7  (via drill 0.35)
  Top 0.15: R1_BAT.2 132.41,48.41 v132.5,48.5 | v132.6,50.7 131.93,50.7 MCP73831.1
  Bottom 0.15: v132.6,50.7 132.6,48.6 v132.5,48.5
N$8  (via drill 0.35)
  Top 0.15: MCP73831.5 128.8,50.4 v128.7,50.3 | v127.5,48.4 128.83,48.4 R2_BAT.2
  Bottom 0.15: v128.7,50.3 128,50.3 127.4,49.7 127.4,48.5 v127.5,48.4
N$9
  Top 0.15: EPD_C12.1 78,16.99 J1.24
N$10
  Top 0.305: IC1.5 68.79,100.63 C_DELAY.2
N$11
  Top 0.15: EPD_C2.1 92.1,23.69 92.1,21.3 89.59,18.79 J1.5
N$12
  Top 0.15: EPD_C10.1 81.4,17.1 81.09,16.79 J1.22
N$14
  Top 0.15: EPD_C8.1 84.94,18.74 82.09,15.89 J1.20
N$15
  Top 0.15: EPD_C7.1 86.74,19.84 82.59,15.69 J1.19
N$16
  Top 0.15: EPD_C6.1 88.54,21.04 83.09,15.59 J1.18
N$18
  Top 0.15: J1.4 90.09,18.39 93.92,22.22 EPD_C1.1
N$23
  Top 0.305: D7.1 92.25,42.75 93.55,44.05 R_CAPACITOR.2
PREVGH
  Top 0.15: EPD_C9.1 83.14,23.7 | 83.14,23.7 83.14,17.84 81.59,16.29 J1.21 | D5.1 76.08,28.5 81.9,28.5 84,26.4 84,24.4 83.3,23.7 83.14,23.7
PREVGL
  Top 0.15: EPD_C11.1 79.7,17 80.59,16.11 J1.23 80.54,14.85 80.54,14.52 80.03,14 76.86,14 D4.2
RESE
  Top 0.15: J1.3 90.44,14.75 90.44,14.42 89.33,13.3 66.29,13.3 R3.2 64.06,14.64 Q3.2
RESE'
  Top 0.15: R2.2 64.06,9.18 R3.1 66.4,7.43 SJ1.2
RESET  (via drill 0.35)
  Top 0.15: R_RESET.1 67.39,109.37 RESET_BUTTON.3 RESET_BUTTON.4 62,109.08 C5.2 58.7,107.5 58.7,106.6 62.25,103.05 62.25,100.7 | IC1.1 62.25,100.7 | v10.8,46.9 10.34,46.44 U2.3 | v59.8,100.7 62.25,100.7
  Bottom 0.15: v59.8,100.7 18,100.7 10.85,93.55 10.85,66.31 10.8,66.26 v10.8,46.9
RTC_RST  (via drill 0.35)
  Top 0.15: U3.4 84.75,60.16 83.2,61.7 72.5,61.7 66.4,55.6 56.4,55.6 48.7,63.3 v37,63.3 | v23.1,63.7 23.1,62.1 U2.16
  Bottom 0.15: v37,63.3 35.9,64.4 23.8,64.4 v23.1,63.7
RX  (via drill 0.35)
  Top 0.15: v12.9,63.7 12.9,62.06 U2.24 | TP2.TP 56.68,78.92 v56.3,79.3
  Bottom 0.15: v12.9,63.7 14.7,65.5 43.8,65.5 45.6,67.3 45.6,74.1 44,75.7 31.7,75.7 30,77.4 30,80 30.8,80.8 54.8,80.8 v56.3,79.3
SCK  (via drill 0.35)
  Top 0.15: D10.2 8.75,38.77 R6.1 8.8,38.72 v8.8,39.8 | v14.1,40.4 14.1,44.49 U2.6 14.3,44.69 v14.3,46.4 | v21.2,100 TP8.TP 9.15,91.55 J4.P5 4.05,91.55 v3.5,91 | U1.6 40.13,53.27 v40.2,53.2 | J1.13 85.59,15.69 v85.8,15.9
  Bottom 0.15: v8.8,39.8 13.5,39.8 v14.1,40.4 | v85.8,15.9 49.2,52.5 40.5,52.5 40.2,52.8 v40.2,53.2 37,56.4 24.3,56.4 v14.3,46.4 12.9,45 10.2,45 8.8,46.4 8.8,73.7 3.5,79 v3.5,91
SCL  (via drill 0.35)
  Top 0.15: R2-PINH.1 U2.20 17.96,60.56 v17.9,60.5 | J3.4 156.52,20.78 v156.5,20.8 | v156.2,13 156.2,11.06 SENSOR2.4 | v142.52,51.72 140.28,51.72 U4.7 | v91.1,49.5 88.74,49.5 U3.16 | v84.1,47.8 82.5,46.2 v80.4,46.2
  Bottom 0.15: v156.2,13 156.5,13.3 v156.5,20.8 156.5,37.7 142.52,51.68 v142.52,51.72 142.52,51.98 141,53.5 95.1,53.5 v91.1,49.5 85.8,49.5 v84.1,47.8 | v17.9,60.5 18.9,59.5 45.1,59.5 48.5,62.9 48.5,71.6 50,73.1 52.3,73.1 79.2,46.2 v80.4,46.2
SDA  (via drill 0.35)
  Top 0.15: R1_PINH.1 19.91,63.91 19.23,63.23 U2.19 19.23,60.57 v19.3,60.5 | SENSOR2.3 154.95,11.31 154.95,11.51 154.3,12.17 v154.3,13.2 | J3.3 154.62,19.78 v154.5,19.9 | v141.4,52.2 140.31,52.2 U4.8 | U3.15 87.7,49.27 v87.7,47.6 | v81.5,44.5 83.5,44.5 v85.4,46.4
  Bottom 0.15: v154.3,13.2 154.3,19.7 v154.5,19.9 154.5,39.1 v141.4,52.2 139.5,52.2 134.9,47.6 v87.7,47.6 86.6,47.6 v85.4,46.4 | v19.3,60.5 20.3,61.5 44.4,61.5 46.7,63.8 46.7,72.6 48.6,74.5 53.4,74.5 81.6,46.3 81.6,44.6 v81.5,44.5
SRC
  Top 0.305: L1.1 67.99,34.06 D5.2 66.88,22.8 C4.1 64.4,21.3 64.4,18.73 Q3.3
SS_SD  (via drill 0.35)
  Top 0.15: R10.1 11.42,38.71 D8.2 11,39.13 11,43.93 U2.4 11.61,45.49 v11.2,45.9 | J4.P2 5.55,88.3 4.5,88.3 v4.1,87.9
  Bottom 0.15: v4.1,87.9 4.1,79.4 9.9,73.6 9.9,46.4 10.4,45.9 v11.2,45.9
TX  (via drill 0.35)
  Top 0.15: v11.6,63.6 11.61,63.59 U2.25 | TP1.TP 61.5,76.8 v59.4,78.9
  Bottom 0.15: v11.6,63.6 15.5,67.5 42.4,67.5 44.4,69.5 44.4,72.6 42.8,74.2 31.1,74.2 28.4,76.9 28.4,80.1 31.3,83 55.3,83 v59.4,78.9
USB_D+  (via drill 0.35)
  Top 0.305: U2.14 26.55,42.3 v26.6,42.3 | D1.1 149.93,54.93 v142.9,47.9
  Bottom 0.305: v26.6,42.3 24.5,40.2 18.6,40.2 10.2,31.8 10.2,15.2 13,12.4 94.3,12.4 112.4,30.5 112.4,38.9 118.6,45.1 140.1,45.1 v142.9,47.9
USB_D-  (via drill 0.35)
  Top 0.305: D1.3 150.63,53.03 v144.2,46.6 | U2.13 23.04,43.36 v24.1,42.3
  Bottom 0.305: v24.1,42.3 18.5,42.3 8.5,32.3 8.5,11.5 9,11 97.1,11 114.9,28.8 114.9,38.9 118.4,42.4 140,42.4 v144.2,46.6
VBAT
  Top 0.305: 131.46,53.19 C2_BAT.2 134.3,55.9 135.8,57.4 TP3.TP 128.2,61 126.1,58.9 126.1,39.3 129.6,35.8 139.2,35.8 140.72,37.32 Q1.3 | 131.46,53.19 MCP73831.3 | 131.46,53.19 133.41,53.19 134.85,51.75 U4.2 U4.3
VBUS
  Top 0.305: PFMF.050.1.2 150.5,50.3 151.5,51.3 156,51.3 156.9,52.2 156.9,53.6 156.52,53.98 D1.5 153.82,53.98 153.5,54.3 153.5,57.7 150.18,61.02 TP14.TP | R1_PWRUSB.1 147.18,45.33 PFMF.050.1.2 | D2.2 135.43,40.92 Q1.1 137.5,42.04 137.5,44.8 138.03,45.33 R1_PWRUSB.1 | CHG_LED.A 169.58,14.19 C5_USB.2 | C5_USB.2 C4_USB.2 | C5_USB.2 167.1,15.97 167.1,32.05 PFMF.050.1.2 | R1_PWRUSB.1 134.48,49.5 127.8,49.5 127.4,49.9 127.4,51.73 MCP73831.4 128.76,53.17 C1_BAT.2
VRTC
  Top 0.305: C10_SUPERCAP.2 97.55,49.34 C8.1 R_CAPACITOR.1 93.52,46.8 87.3,46.8 86.02,48.09 U3.14
VUSB
  Top 0.305: J2.A4 163.58,51.68 162.16,51.68 159.73,49.25 155.6,49.25 PFMF.050.1.1 | J2.A4 J2.B9 | J2.A9 J2.B4 164.27,56.55 165.15,55.67 165.15,52.63 164.64,52.12 164.02,52.12 J2.A4